# EAGLE board Grove-Gas Sensor v1.4 (EAGLE 6.4)
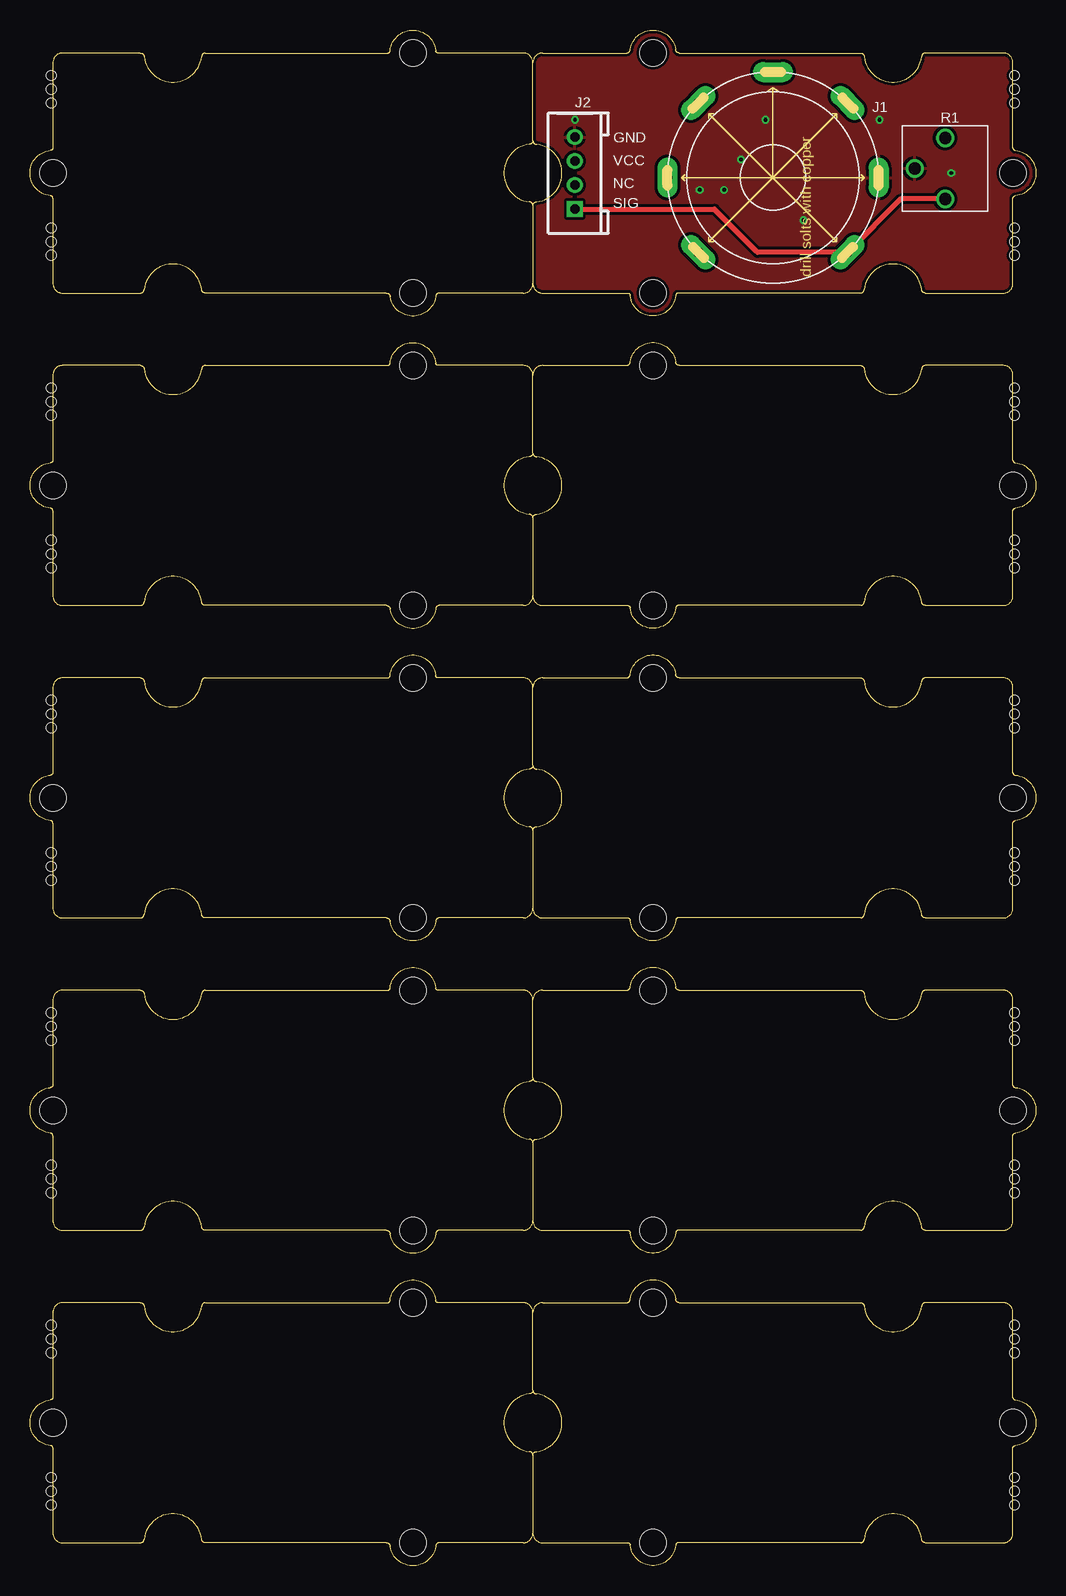
[diagram p0: board, top side]
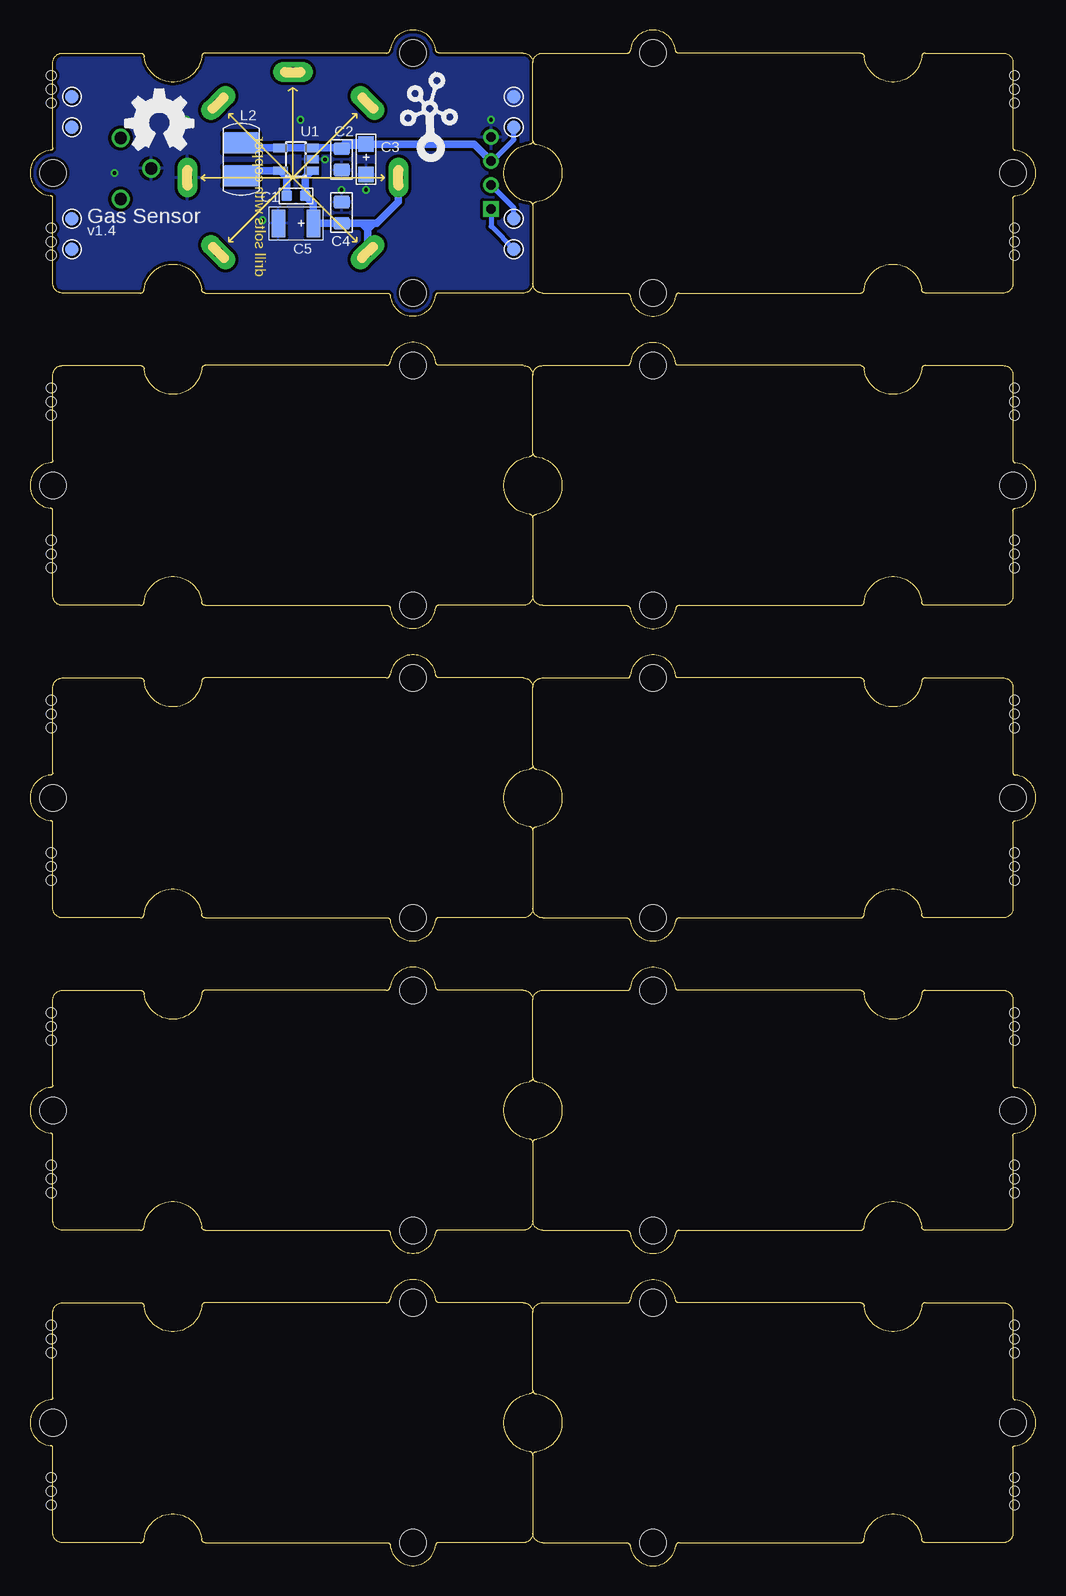
[diagram p1: board, bottom side, seen from below]

Size 83.82 x 127.98 mm. Coordinates in mm from the lower left corner, seen from the top.
Copper layers (1*16): Top 0.035mm / dielectric 1.5mm / Bottom 0.035mm
Design rules "SeeedStudio_rule_no_angle_090911 *": minimum track width 6mil, minimum drill 12mil, track to track 6mil, track to pad 6mil, pad to pad 6mil, via to via 6mil, smd to smd 0mil, copper to edge 10mil, drill to drill 10mil, minimum pad ring 10mil, minimum via ring 6mil, stop-mask expansion 2mil, vias tented up to drill 25mil, thermal gap 10mil
Holes 0.8 mm at 1.78,124.19 1.78,121.9 1.78,123.05 1.78,111.49 1.78,109.2 1.78,110.35 1.78,98.15 1.78,95.87 1.78,97.01 1.78,85.45 1.78,83.17 1.78,84.31 1.78,72.12 1.78,69.83 1.78,70.98 1.78,59.42 1.78,57.13 1.78,58.28 1.78,46.08 1.78,43.8 1.78,44.94 1.78,33.38 1.78,31.1 1.78,32.24 1.78,20.05 1.78,17.76 1.78,18.91 1.78,7.35 1.78,5.06 1.78,6.21 82.04,121.9 82.04,124.19 82.04,123.05 82.04,109.2 82.04,111.49 82.04,110.35 82.04,95.87 82.04,98.15 82.04,97.01 82.04,83.17 82.04,85.45 82.04,84.31 82.04,69.83 82.04,72.12 82.04,70.98 82.04,57.13 82.04,59.42 82.04,58.28 82.04,43.8 82.04,46.08 82.04,44.94 82.04,31.1 82.04,33.38 82.04,32.24 82.04,17.76 82.04,20.05 82.04,18.91 82.04,5.06 82.04,7.35 82.04,6.21
Holes 1.91 mm at -4.13,3.03 87.95,3.03 87.95,126.22 -4.13,126.22

## Footprints (pad centres in the part's own frame; a part is rotated, then mirrored left to right if it is on the bottom)
C0603 = smd 0.889 x 0.889: 1 -0.762,0; 2 0.762,0
C0805 = smd 1.016 x 1.397: 1 -0.889,0; 2 0.889,0
AVX-A = smd 1.27 x 1.27: + -1.27,0; - 1.27,0
AVX-B = smd 1.143 x 2.286: + -1.46,0; - 1.46,0
6P-D17.6X9.8H = drill 0.8 pad 1.676 long: 1 -6.223,6.223; 2 0,8.8; 3 6.223,6.223; 4 6.223,-6.223; 5 0,-8.8; 6 -6.223,-6.223; 7 8.8,0
4P-LEADED-2.0 = drill 0.8 pad 1.27 square: 1 -3,0 | drill 0.8 pad 1.27: 2 -1,0; 3 1,0; 4 3,0
SD32-4R7MC = smd 1.75 x 3: 1 -1.375,0; 2 1.375,0
ROUND-MARK-1.0 = smd 1.016 x 1.016: P$1 0,0
PACKAGE__RESISTANCE = drill 1.016: 1 -2.286,-0.254; 2 0.254,-2.794; 3 2.794,-0.254
TP_4545 = smd 1.143 x 1.143: T 0,0
SOT23-5 = smd 0.69 x 1.2: 1 -0.95,-1.3; 2 0,-1.3; 3 0.95,-1.3; 4 0.95,1.3; 5 -0.95,1.3
GROVE-TEST-PLATFORM = hole 2.2: -10,-10; -10,10; 20,0

## Placement (x,y rotation side)
C1  DNP  [C0603]  61.66,114.16 0 bottom
C2  10uF/25v  [C0805]  57.85,117.2 270 bottom
C3  DNP  [AVX-A]  55.82,117.2 270 bottom
C4  10uF/25v  [C0805]  57.85,112.76 90 bottom
C5  100uF/6.3v  [AVX-B]  61.66,111.87 180 bottom
J1  Gas Sensor Socket  [6P-D17.6X9.8H]  61.91,115.68 90 top
J2  [4P-LEADED-2.0]  45.4,116.06 90 top
L2  CD32-100  [SD32-4R7MC]  66.23,117.2 270 bottom
P1  [ROUND-MARK-1.0]  -4.13,8.11 0 top  (outside the outline)
P2  [ROUND-MARK-1.0]  87.95,8.11 0 top  (outside the outline)
P3  [ROUND-MARK-1.0]  -4.13,121.14 0 top  (outside the outline)
P4  [ROUND-MARK-1.0]  87.95,121.14 0 top  (outside the outline)
R1  10K  [PACKAGE__RESISTANCE]  76.52,116.7 270 top
TP1  [TP_4545]  43.5,109.71 0 bottom
TP2  [TP_4545]  43.5,112.25 0 bottom
TP3  [TP_4545]  43.5,119.87 0 bottom
TP4  [TP_4545]  43.5,122.41 0 bottom
TP5  [TP_4545]  80.33,122.41 0 bottom
TP6  [TP_4545]  80.33,119.87 0 bottom
TP7  [TP_4545]  80.33,112.25 0 bottom
TP8  [TP_4545]  80.33,109.71 0 bottom
U1  [SOT23-5]  61.66,117.2 90 bottom
U$1  [OSHW_FILLX200_NOTEXT]  75.88,117.97 0 bottom
U$2  [GROVE-TEST-PLATFORM]  21.91,116.06 180 top
U$3  [TWIGLOGO]  50.48,117.97 0 bottom
U$6  [GROVE-TEST-PLATFORM]  61.91,116.06 0 top
U$7  [GROVE-TEST-PLATFORM]  21.91,90.03 180 top
U$8  [GROVE-TEST-PLATFORM]  61.91,90.03 0 top
U$9  [GROVE-TEST-PLATFORM]  21.91,63.99 180 top
U$10  [GROVE-TEST-PLATFORM]  61.91,63.99 0 top
U$11  [GROVE-TEST-PLATFORM]  21.91,37.96 180 top
U$12  [GROVE-TEST-PLATFORM]  61.91,37.96 0 top
U$13  [GROVE-TEST-PLATFORM]  21.91,11.92 180 top
U$14  [GROVE-TEST-PLATFORM]  61.91,11.92 0 top

## Library data of the parts
C1-C5 = Discrete
J1 L2 = template
J2 = Connector
P1-P4 = Discrete-new; PARTNO: DNP
R1 = test
TP1-TP8 = Discrete; PARTNO: DNP
U1 = IC
U$1 U$3 = Logo
U$2 U$6-U$14 = moudle

## Nets
5V: C1.2 C4.1 C5.+ J1.1 J1.2 U1.1
GND: C2.2 C3.- C4.2 C5.- J1.5 J2.4 R1.2 TP4.T U1.2
N$2: C1.1 L2.2 U1.5
N$4: J2.2 TP2.T
OUT: J1.6 J2.1 R1.3 TP1.T
VCC: C2.1 C3.+ J2.3 L2.1 TP3.T U1.3 U1.4

## Tracks (layer width: path | path; a pad name or v marks a point on that pad's centre or on a via)
5V
  Bottom 0.61: U1.1 60.9,115.72 C1.2 60.2,113.46 C5.+ C4.1 55.69,111.87 | 55.69,111.87 54.93,111.87 53.11,113.69 J1.2 | J1.1 55.69,111.31 55.69,111.36 | 55.69,111.36 55.69,111.87 | 55.69,111.87 | 55.69,111.36 | 55.69,111.36 56.07,111.74 | 55.69,111.36 55.31,111.74
GND  (via drill 0.3 pad 0.64)
  other vias: 55.82,114.66 57.85,114.66 59.25,117.2 64.45,112.12 76.77,116.06 70.8,120.51 45.4,120.51 61.28,120.51
  pour Top (isolate 0.254): 39.69,128.13 85.41,128.13 85.41,103.36 39.69,103.36
  pour Bottom (isolate 0.254): 39.69,128.13 85.41,128.13 85.41,103.36 39.69,103.36
N$2
  Bottom 0.61: L2.2 65.81,116.25 U1.5 62.42,115.72 C1.1
N$4
  Bottom 0.406: TP2.T 43.5,113.16 J2.2
OUT
  Top 0.406: J2.1 57.04,113.06 60.58,109.52 60.64,109.46 J1.6 | J1.6 | R1.3 72.58,113.9 J1.6
  Bottom 0.406: J2.1 45.4,111.62 TP1.T
VCC
  Bottom 0.406: J2.3 45.29,117.06 43.5,118.86 TP3.T
  Bottom 0.61: C2.1 57.91,118.15 U1.3 U1.4 65.81,118.15 L2.1 | C3.+ 46.82,118.47 J2.3
  Bottom 0.813: C3.+ 57.47,118.47 C2.1

## Text on the board
tPlace: GND | VCC | NC | SIG
bPlace: Gas Sensor | v1.4